# EAGLE board Fuzz (EAGLE 9.3.0)
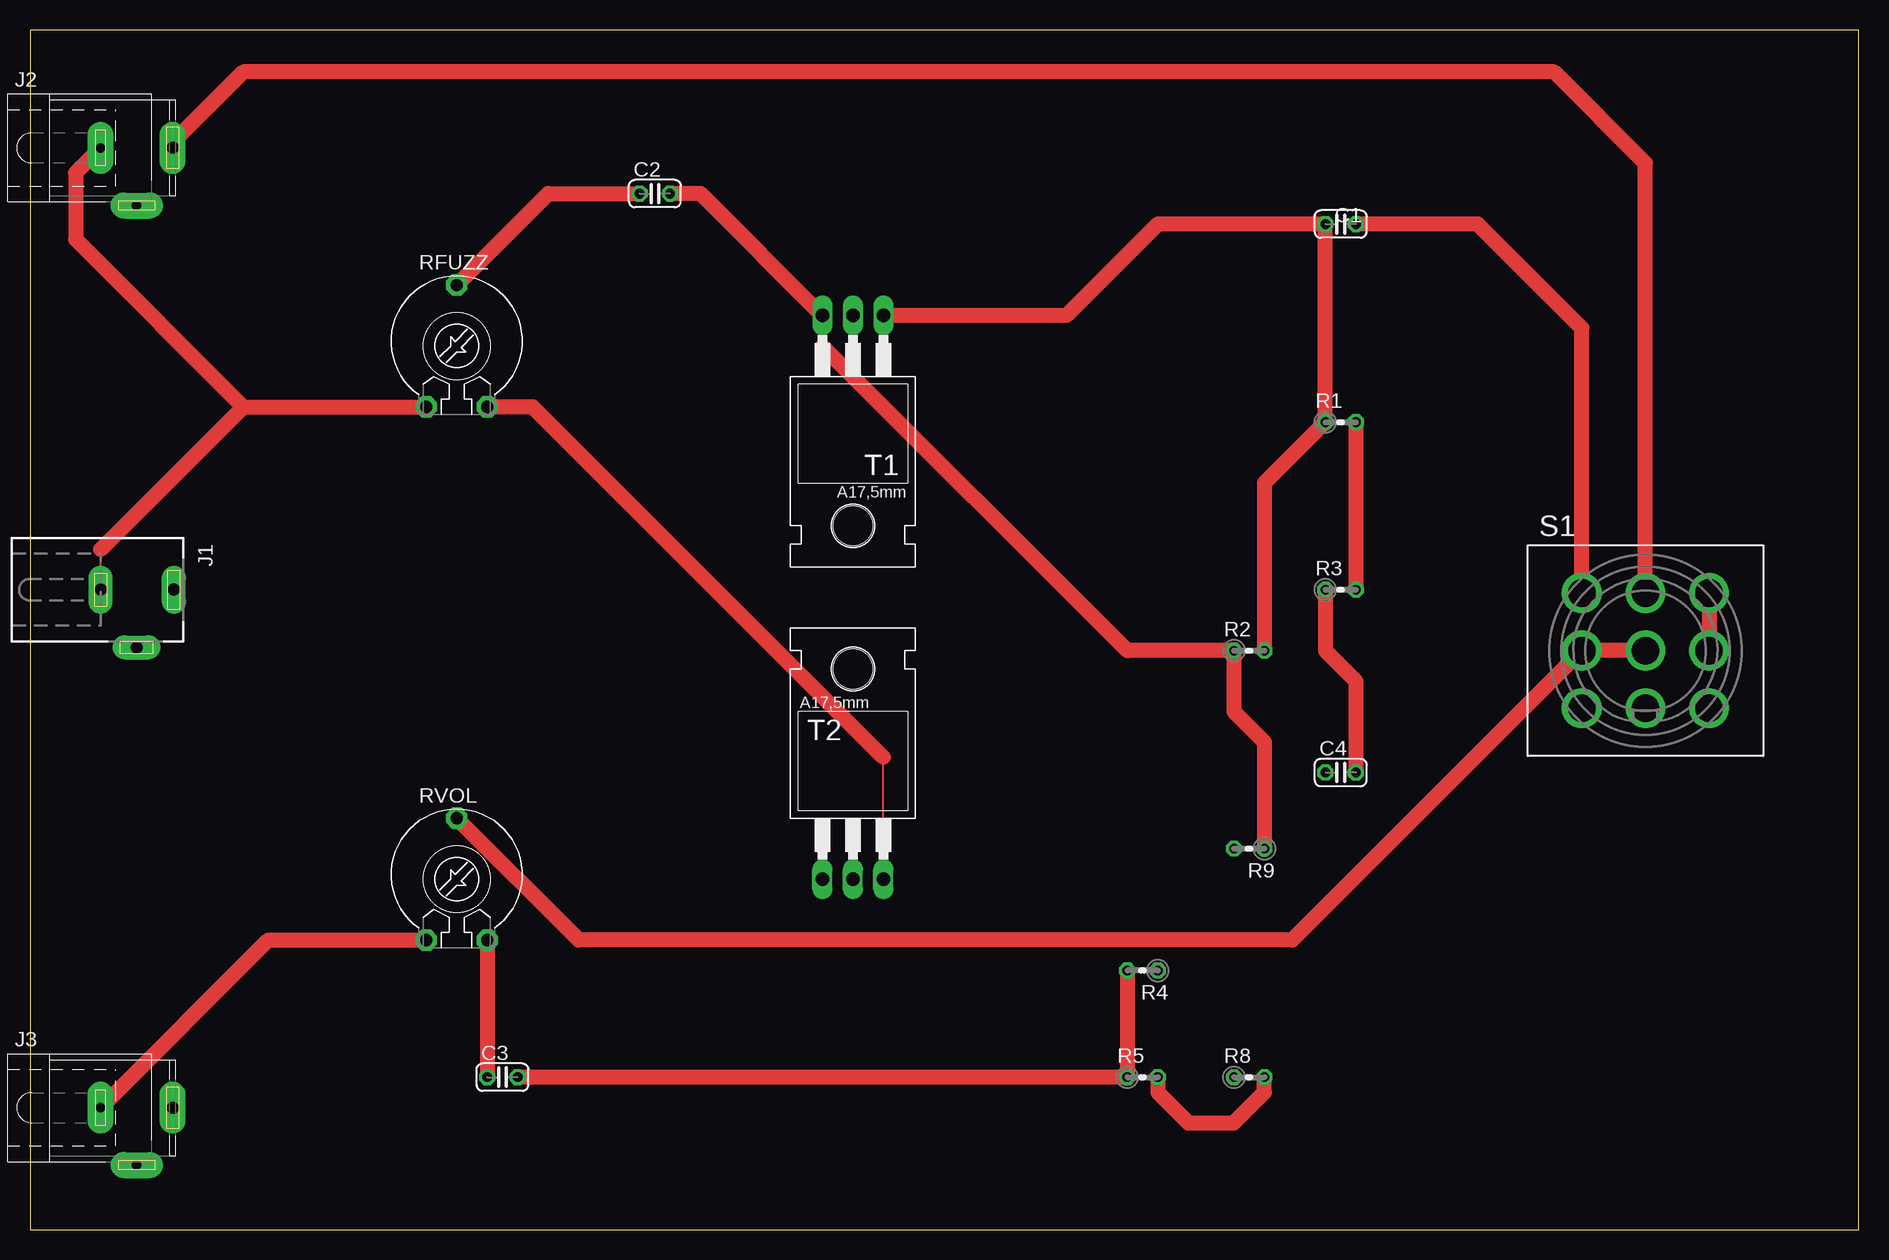
[diagram p0: board, top side]
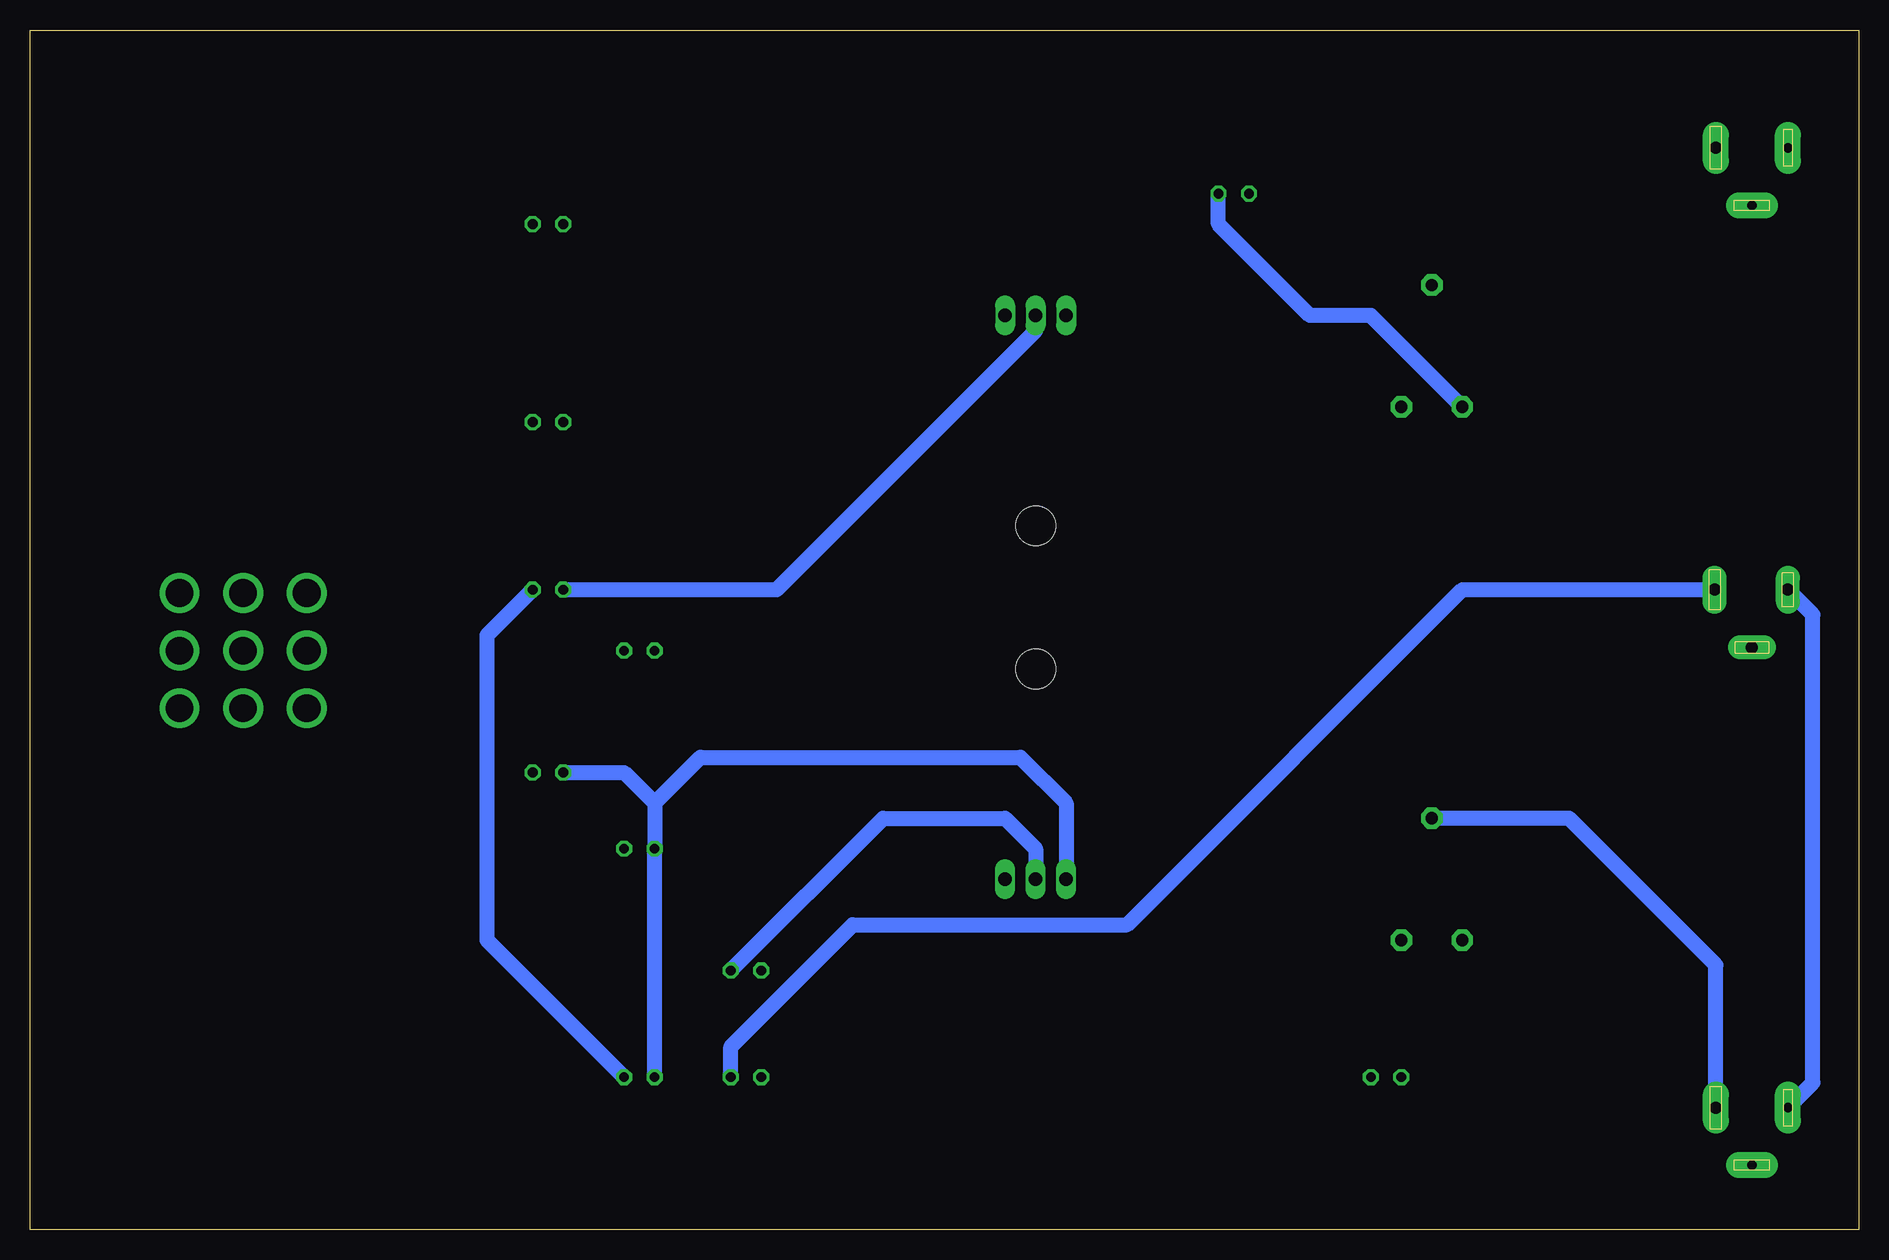
[diagram p1: board, bottom side, seen from below]

Size 152.38 x 100 mm. Coordinates in mm from the lower left corner, seen from the top.
Outline: 0,0 152.38,0 152.38,100 0,100 0,0
Copper layers (1*16): Top 0.035mm / dielectric 1.5mm / Bottom 0.035mm
Design rules "default": minimum track width 6mil, minimum drill 0.35mm, track to track 6mil, track to pad 6mil, pad to pad 6mil, via to via 6mil, smd to smd 6mil, copper to edge 40mil, drill to drill 6mil, minimum pad ring 10mil, minimum via ring 8mil, stop-mask expansion 4mil, vias tented up to drill 0mil, thermal gap 10mil

## Footprints (pad centres in the part's own frame; a part is rotated, then mirrored left to right if it is on the bottom)
C025-024X044 = drill 0.813 octagon: 1 -1.27,0; 2 1.27,0
DCJ0202 = drill 1 pad 2 long: 1 0,3.1; 2 4.8,0; 3 0,-3
SPC4078 = drill 0.8 pad 2.184 long: 1 -3,0; 2 0,-4.8 | drill 1 pad 2.184 long: 3 3,0
0204V = drill 0.813 octagon: 1 -1.27,0; 2 1.27,0
PT-10 = drill 1.016 pad 1.778 octagon: 1 -2.54,-5.08; 2 2.54,-5.08; 3 0,5.08
3PDT = drill 2.3 pad 3.1: 1 -5.3,4.8; 2 0,4.8; 3 5.3,4.8; 4 -5.3,0; 5 0,0; 6 5.3,0; 7 -5.3,-4.8; 8 0,-4.8; 9 5.3,-4.8
TO220 = drill 1.118 long: 1 -2.54,-6.35; 2 0,-6.35; 3 2.54,-6.35 | hole 3.302: 0,11.176

## Placement (x,y rotation side)
C1  0.1u  [C025-024X044]  109.22,83.82 0 top
C2  20u  [C025-024X044]  52.07,86.36 0 top
C3  0.01u  [C025-024X044]  39.37,12.7 0 top
C4  0.1u  [C025-024X044]  109.22,38.1 0 top
J1  DCJ0202  [DCJ0202]  8.89,53.34 270 top
J2  [SPC4078]  8.89,90.17 0 top
J3  [SPC4078]  8.89,10.16 0 top
R1  100k  [0204V]  109.22,67.31 0 top
R2  30k  [0204V]  101.6,48.26 0 top
R3  33k  [0204V]  109.22,53.34 0 top
R4  1k  [0204V]  92.71,21.59 180 top
R5  3k  [0204V]  92.71,12.7 0 top
R8  10k  [0204V]  101.6,12.7 0 top
R9  10k  [0204V]  101.6,31.75 180 top
RFUZZ  10k  [PT-10]  35.56,73.66 0 top
RVOL  100k  [PT-10]  35.56,29.21 0 top
S1  3PDT  [3PDT]  134.62,48.26 0 top
T1  2SC2509H  [TO220]  68.58,69.85 180 top
T2  2SC2509H  [TO220]  68.58,35.56 0 top

## Library data of the parts
C1-C4 = rcl; SPICEPREFIX: C
J1-J3 = con-jack; OC_FARNELL: unknown; OC_NEWARK: unknown
R1-R5 R8 R9 = rcl; SPICEPREFIX: R
RFUZZ RVOL = rcl; SPICEMODEL: POT; SPICEPREFIX: X
S1 = switch
T1 T2 = transistor-neu-to92

## Nets
9V: J1.1 R1.2 R3.2 R5.2 R8.2
AGND: C2.2 J1.3 J2.1 J3.1 R2.1 R9.1 RFUZZ.1 RVOL.1 T1.3
FIN: C1.1 R1.1 R2.2 T1.1
FULL: R4.1 T2.2
INT: C4.1 R8.1 R9.2 T2.1
INTRAW: C4.2 R3.1 T1.2
N$1: RFUZZ.2 T2.3
N$2: S1.3 S1.6
N$3: C1.2 S1.1
N$4: C3.1 RVOL.2
N$5: C2.1 RFUZZ.3
OUT: J3.3 RVOL.3 S1.4 S1.5
RAW: C3.2 R4.2 R5.1
SIG: J2.3 S1.2

## Tracks (layer width: path | path; a pad name or v marks a point on that pad's centre or on a via)
9V
  Top 1.27: R1.2 R3.2 | R5.2 93.98,11.43 96.52,8.89 100.33,8.89 102.87,11.43 R8.2
  Bottom 1.27: R3.2 114.3,49.53 114.3,24.13 R8.2 | R5.2 93.98,15.24 83.82,25.4 60.96,25.4 33.02,53.34 J1.1
AGND
  Top 0.152: J1.3 5.89,56.69 | 5.89,90.07 5.89,90.16 J2.1 | 66.04,73.66 T1.3
  Top 1.27: R9.1 102.87,40.64 100.33,43.18 R2.1 91.44,48.26 66.04,73.66 | J3.1 19.86,24.13 RVOL.1 | 17.78,68.58 RFUZZ.1 | J2.1 3.81,88.09 3.81,82.55 17.78,68.58 | 5.89,56.69 17.78,68.58 | T1.3 55.88,86.36 C2.2
  Bottom 0.152: 5.89,10.21 J3.1 | J1.3
  Bottom 1.27: J3.1 3.81,12.24 3.81,51.26 J1.3 | RFUZZ.1 40.64,76.2 45.72,76.2 53.34,83.82 C2.2
FIN
  Top 1.27: T1.1 86.36,76.2 93.98,83.82 C1.1 R1.1 102.87,62.23 R2.2
FULL
  Bottom 1.27: R4.1 81.28,34.29 71.12,34.29 68.58,31.75 T2.2
INT
  Bottom 1.27: R8.1 R9.2 100.33,35.56 | C4.1 102.87,38.1 100.33,35.56 | 100.33,35.56 96.52,39.37 69.85,39.37 66.04,35.56 T2.1
INTRAW
  Top 1.27: R3.1 107.95,48.26 110.49,45.72 C4.2
  Bottom 0.152: 68.58,74.93 T1.2
  Bottom 1.27: R3.1 90.17,53.34 68.58,74.93
N$1
  Top 0.152: T2.3 71.12,39.37
  Top 1.27: 71.12,39.37 41.91,68.58 RFUZZ.2
N$2
  Top 1.27: S1.3 S1.6
N$3
  Top 1.27: S1.1 129.32,75.15 120.65,83.82 C1.2
N$4
  Top 1.27: RVOL.2 C3.1
  Bottom 0.152: 38.05,12.7 C3.1
N$5
  Top 0.152: 50.8,86.41 C2.1
  Top 1.27: RFUZZ.3 43.18,86.36 C2.1
OUT
  Top 0.152: 35.56,33.78 RVOL.3 | 11.99,10.21 J3.3
  Top 1.27: S1.5 S1.4 105.19,24.13 45.72,24.13 RVOL.3
  Bottom 1.27: J3.3 11.89,22.05 24.13,34.29 RVOL.3
RAW
  Top 1.27: R4.2 R5.1 C3.2
SIG
  Top 0.152: 11.89,90.63 J2.3
  Top 1.27: S1.2 134.62,88.9 127,96.52 17.78,96.52 11.89,90.63
  Bottom 0.152: 11.99,90.07 J2.3